# EAGLE board Luminis_20210105 (EAGLE 9.3.2)
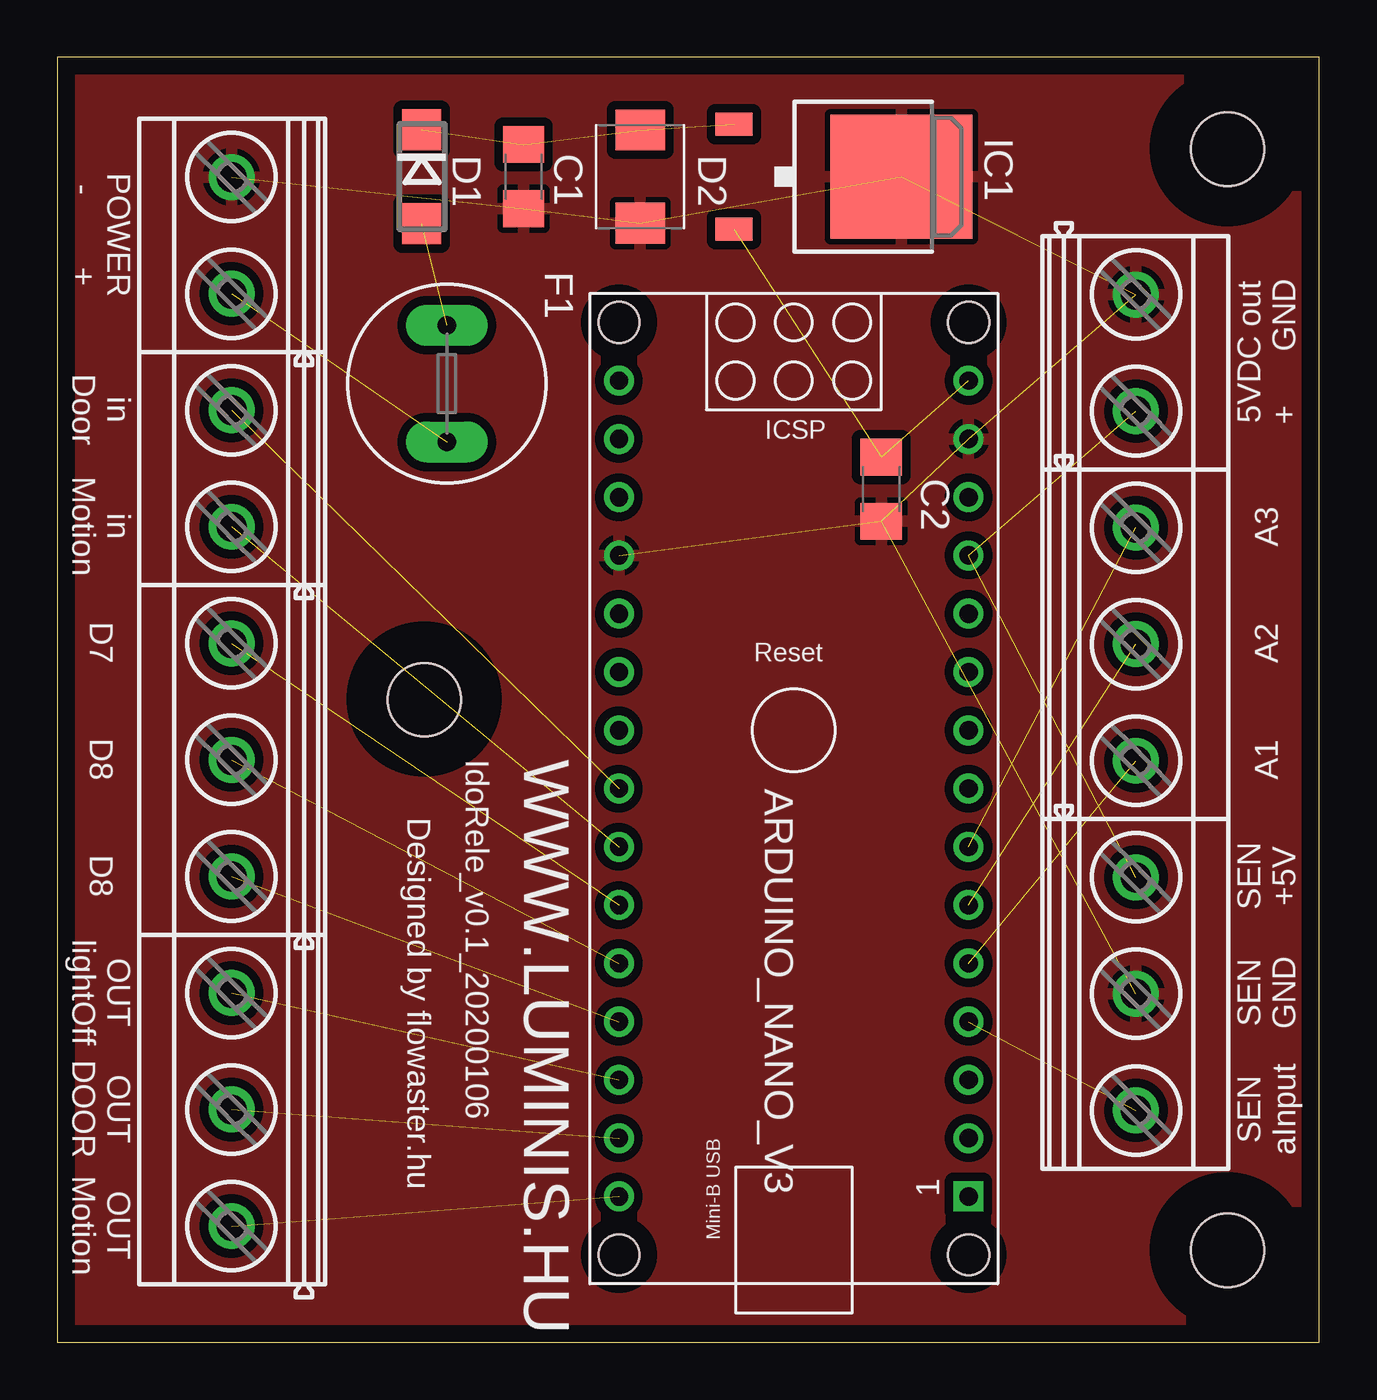
[diagram p0: board, top side]
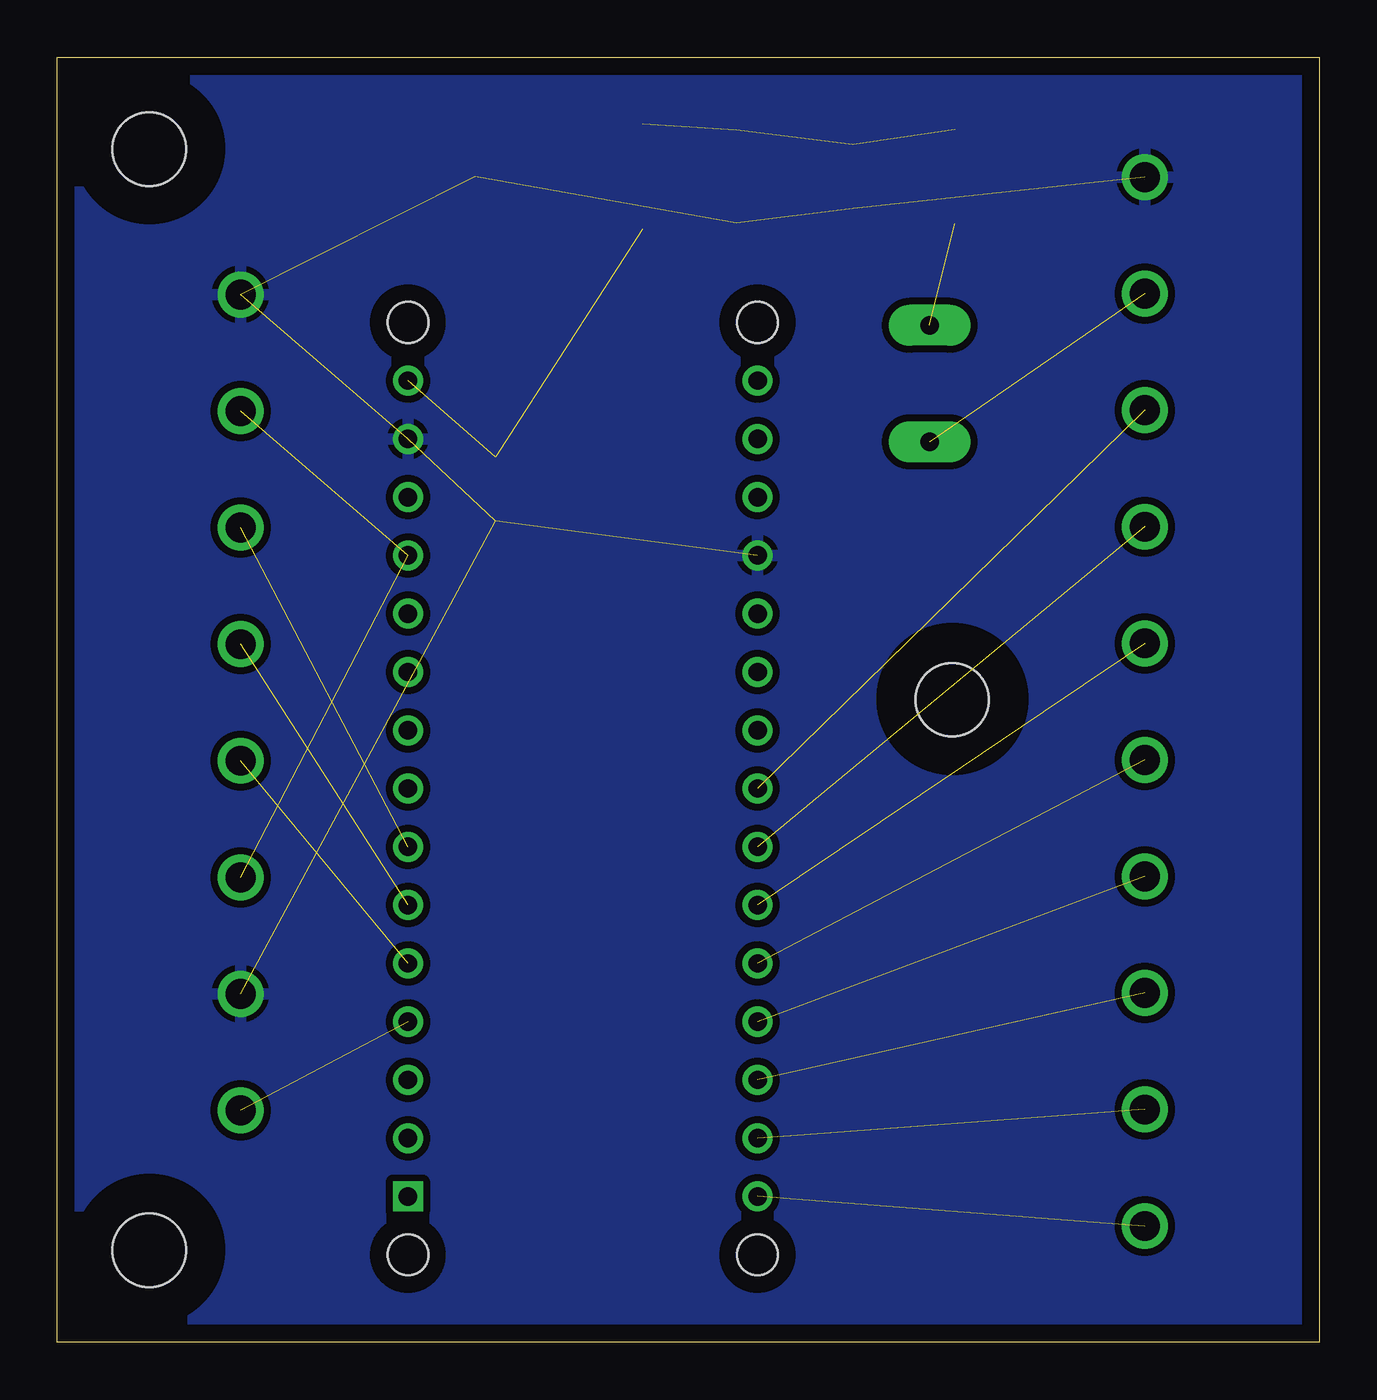
[diagram p1: board, bottom side, seen from below]

Size 55 x 56 mm. Coordinates in mm from the lower left corner, seen from the top.
Outline: 0,0 55,0 55,56 0,56 0,0
Copper layers (1*16): Top 0.035mm / dielectric 1.5mm / Bottom 0.035mm
Design rules "default *": minimum track width 30mil, minimum drill 0.35mm, track to track 6mil, track to pad 6mil, pad to pad 6mil, via to via 6mil, smd to smd 6mil, copper to edge 30mil, drill to drill 6mil, minimum pad ring 10mil, minimum via ring 8mil, stop-mask expansion 4mil, vias tented up to drill 0mil, thermal gap 10mil
Holes 3.2 mm at 51,52 51,4 16,28
tRestrict: area 48,49 to 54,55; area 48,1 to 54,7; area 13,25 to 19,31
bRestrict: area 48,49 to 54,55; area 48,1 to 54,7; area 13,25 to 19,31

## Footprints (pad centres in the part's own frame; a part is rotated, then mirrored left to right if it is on the bottom)
ARDUINO_NANO = drill 0.8 square: 1 -20.32,-7.62 | drill 0.8: 2 -17.78,-7.62; 3 -15.24,-7.62; 4 -12.7,-7.62; 5 -10.16,-7.62; 6 -7.62,-7.62; 7 -5.08,-7.62; 8 -2.54,-7.62; 9 0,-7.62; 10 2.54,-7.62; 11 5.08,-7.62; 12 7.62,-7.62; 13 10.16,-7.62; 14 12.7,-7.62; 15 15.24,-7.62; 16 15.24,7.62; 17 12.7,7.62; 18 10.16,7.62; 19 7.62,7.62; 20 5.08,7.62; 21 2.54,7.62; 22 0,7.62; 23 -2.54,7.62; 24 -5.08,7.62; 25 -7.62,7.62; 26 -10.16,7.62; 27 -12.7,7.62; 28 -15.24,7.62; 29 -17.78,7.62; 30 -20.32,7.62 | hole 1.778: -22.86,-7.62; -22.86,7.62; 17.78,7.62; 17.78,-7.62
C1206 = smd 1.6 x 1.8: 1 -1.4,0; 2 1.4,0
DO214AC = smd 1.8 x 1.7: A 2.05,0; C -2.05,0
SMBJ = smd 1.78 x 2.16: A 2.04,0; C -2.03,0
TR5 = drill 0.813 pad 1.778 long: 1 -2.54,0; 2 2.54,0
TO252 = smd 1 x 1.6: 1 -2.28,-4.8; 2 2.28,-4.8 | smd 5.4 x 6.2: 3 0,2.5
MKDSN1,5/2-5,08 = drill 1.3 pad 2: 1 -2.561,0.025; 2 2.519,0.025
MKDSN1,5/3-5,08 = drill 1.3 pad 2: 1 -7.641,0.025; 2 -2.561,0.025; 3 2.519,0.025

## Placement (x,y rotation side)
ARDUINO_NANO_V3  [ARDUINO_NANO]  32.1,26.67 90 top
C1  330n  [C1206]  20.32,50.8 270 top
C2  100n  [C1206]  35.91,37.18 270 top
D1  ES1B  [DO214AC]  15.88,50.8 270 top
D2  SMBJ24CD-M3/H  [SMBJ]  25.4,50.8 270 top
F1  TR5, 0,5A  [TR5]  16.98,41.78 270 top
IC1  7808DT  [TO252]  34.29,50.8 270 top
IN  MKDSN1,5/2-5,08  [MKDSN1,5/2-5,08]  7.62,38.1 90 top
OUT  MKDSN1,5/3-5,08  [MKDSN1,5/3-5,08]  7.62,12.7 90 top
OUT1  MKDSN1,5/3-5,08  [MKDSN1,5/3-5,08]  46.99,12.62 270 top
OUT2  MKDSN1,5/3-5,08  [MKDSN1,5/3-5,08]  46.99,27.86 270 top
OUT3  MKDSN1,5/3-5,08  [MKDSN1,5/3-5,08]  7.62,27.94 90 top
PWR  MKDSN1,5/2-5,08  [MKDSN1,5/2-5,08]  7.62,48.26 90 top
X1  MKDSN1,5/2-5,08  [MKDSN1,5/2-5,08]  46.99,43.1 270 top

## Library data of the parts
ARDUINO_NANO_V3 = ArduinoNanoV30
C1 C2 = rcl; SPICEPREFIX: C
D1 D2 = diode
F1 = fuse; OC_FARNELL: unknown; OC_NEWARK: unknown
IC1 = linear
IN OUT OUT1-OUT3 PWR X1 = con-phoenix-508

## Nets
+5V: ARDUINO_NANO_V3.12 OUT1.1 X1.2
D7: ARDUINO_NANO_V3.25 OUT3.3
D8: ARDUINO_NANO_V3.26 OUT3.2
D9: ARDUINO_NANO_V3.27 OUT3.1
GND: ARDUINO_NANO_V3.14 ARDUINO_NANO_V3.19 C1.2 C2.2 D2.A IC1.3 OUT1.2 PWR.2 X1.1
N$1: ARDUINO_NANO_V3.4 OUT1.3
N$2: ARDUINO_NANO_V3.5 OUT2.3
N$3: ARDUINO_NANO_V3.30 OUT.1
N$4: ARDUINO_NANO_V3.6 OUT2.2
N$5: F1.2 PWR.1
N$6: ARDUINO_NANO_V3.29 OUT.2
N$7: ARDUINO_NANO_V3.28 OUT.3
N$8: ARDUINO_NANO_V3.7 OUT2.1
N$9: ARDUINO_NANO_V3.24 IN.1
N$10: ARDUINO_NANO_V3.23 IN.2
N$46: D1.A F1.1
N$48: ARDUINO_NANO_V3.15 C2.1 IC1.2
VCC: C1.1 D1.C D2.C IC1.1

## Tracks (layer width: path | path; a pad name or v marks a point on that pad's centre or on a via)
+5V  (2 unrouted)
D7  (1 unrouted)
D8  (1 unrouted)
D9  (1 unrouted)
GND  (8 unrouted)
  pour Bottom (isolate 0.305): 0,56 55,56 55,0 0,0
  pour Top (isolate 0.381): 0,56 55,56 55,0 0,0
N$1  (1 unrouted)
N$2  (1 unrouted)
N$3  (1 unrouted)
N$4  (1 unrouted)
N$5  (1 unrouted)
N$6  (1 unrouted)
N$7  (1 unrouted)
N$8  (1 unrouted)
N$9  (1 unrouted)
N$10  (1 unrouted)
N$46  (1 unrouted)
N$48  (2 unrouted)
VCC  (3 unrouted)

## Text on the board
tPlace: POWER / - + | 5VDC out / + GND | in / Door | in / Motion | A3 | D7 | A2 | D8 | IdoRele_v0.1_20200106 | WWW.LUMINIS.HU | A1 | Designed by flowaster.hu | D8 | SEN / +5V | OUT / lightOff | SEN / GND | OUT / DOOR | SEN / aInput | OUT / Motion